# Altium PCB PCB_Challenge_1.PcbDoc
Units mil, origin at the board's own origin, x right, y up, seen from the top; angles counter-clockwise.
Board outline 3000 x 1995 mil, 2 copper layers (Top Layer, Bottom Layer); 50 components, 26 nets, 156 pads, 22 vias.
Unrouted connection lines stored in the file: 4.
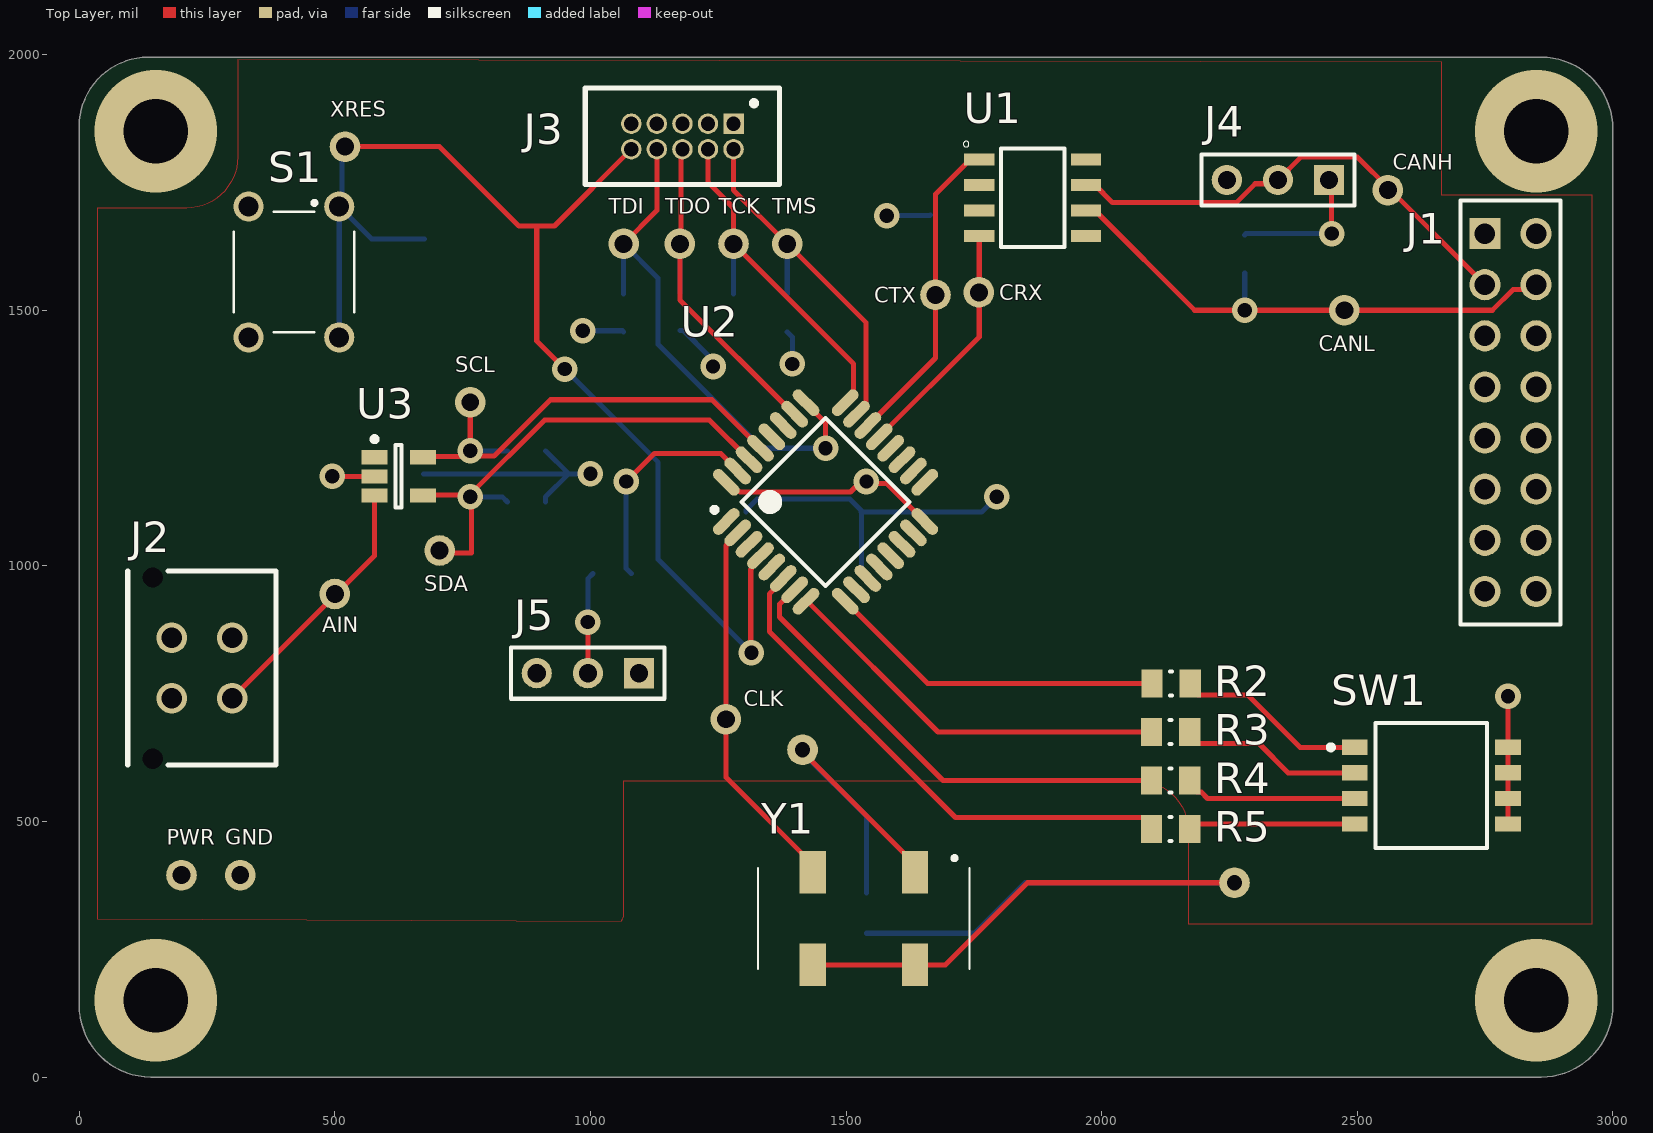
[diagram p0: Top Layer view]
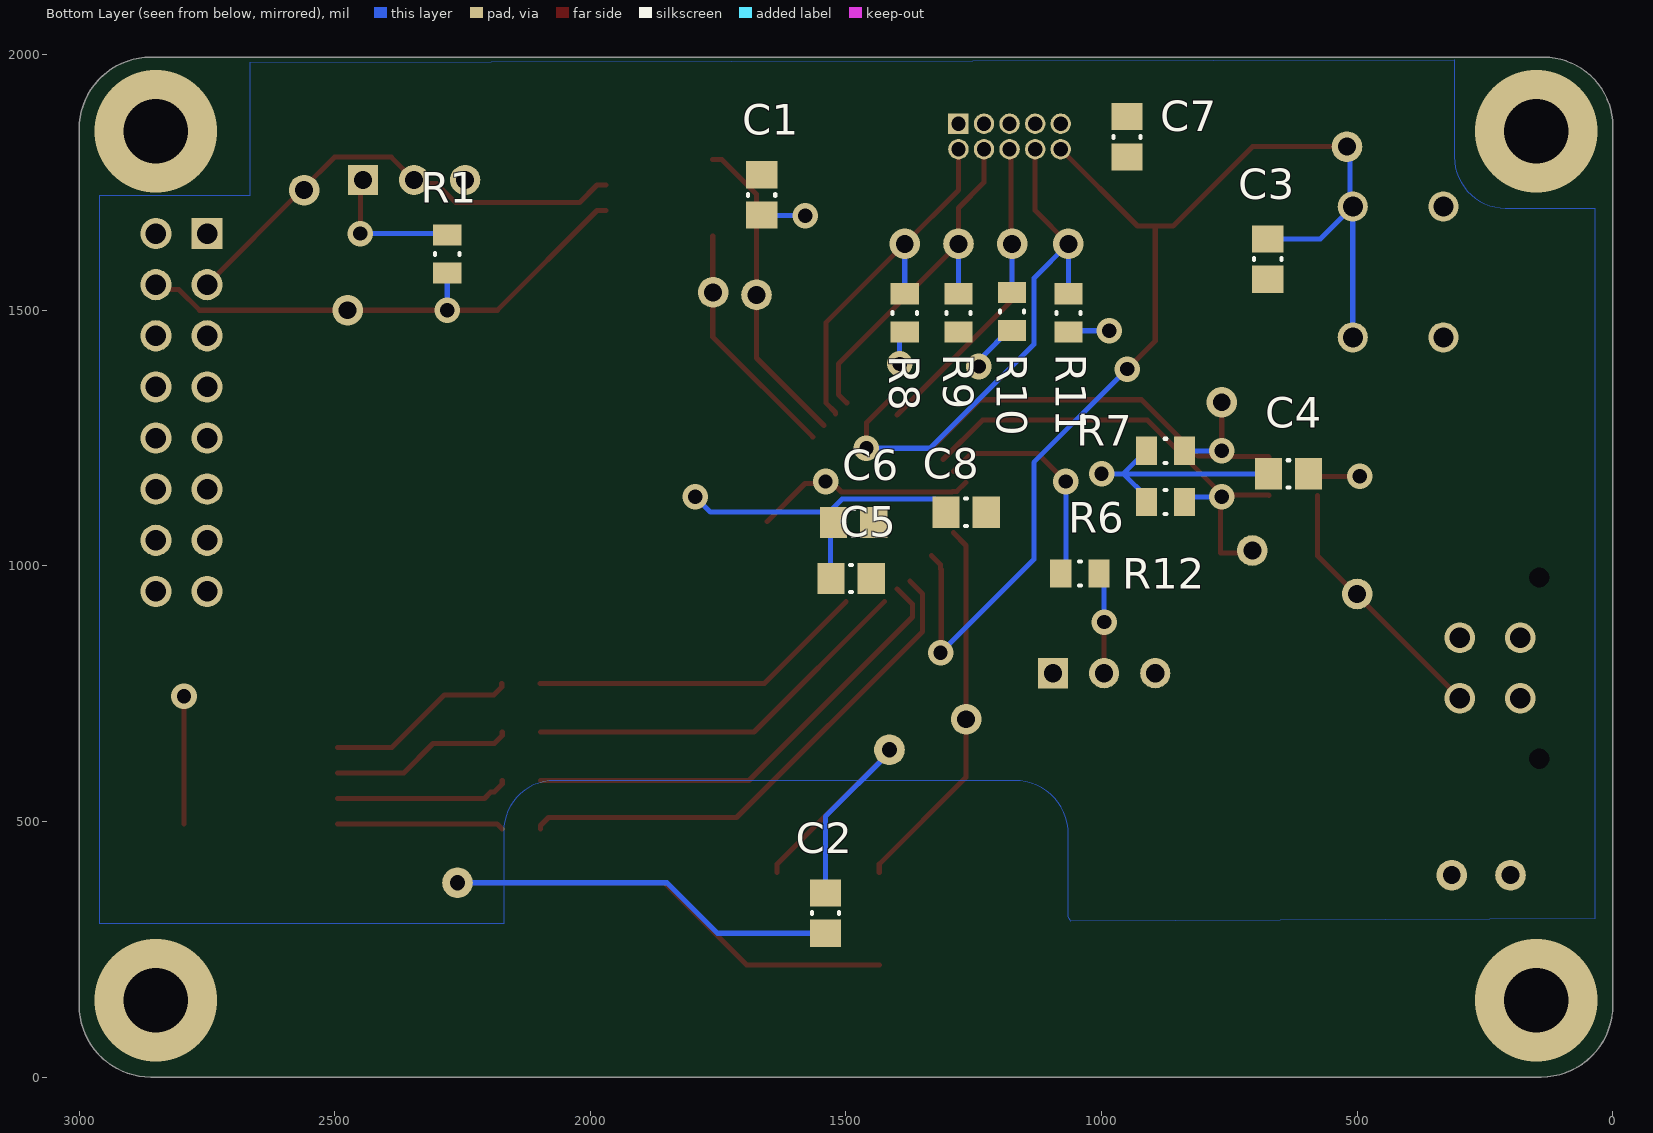
[diagram p1: Bottom Layer view, seen from below]

## Layer stack, top to bottom
Top Solder: solder mask 0.4, Solder Resist, Dk 3.5
Top Layer: signal copper 1.4
Dielectric 1: dielectric 12.6, FR-4, Dk 4.8
Bottom Layer: signal copper 1.4
Bottom Solder: solder mask 0.4, Solder Resist, Dk 3.5

## Board outline
135,1995 2860,1995 cw(c2860,1855) 3000,1855 3000,140 cw(c2860,140) 2860,0 140,0 cw(c140,140) 0,140 0,1860 cw(c135,1860)

## Design rules (kind name [scope] priority, off if disabled: settings)
Clearance [All] p1: gap=10 ignorepadtopadclearanceinfootprint=FALSE except(0: Arc-Hole Track-Hole SMDPad-Hole THPad-Hole Via-Hole Fill-Hole Poly-Hole Region-Hole Text-Hole)
PolygonConnect [All] p1: connectstyle=Relief reliefconductorwidth=10 reliefentries=4 polygonreliefangle="90 Angle" airgapwidth=10
RoutingVias [All] p1: holewidth=28 width=50 viastyle="Through Hole" minholewidth=28 minwidth=50 maxholewidth=28 maxwidth=50
SolderMaskExpansion [All] p1: expansion=4 istentingtop=FALSE
Width [All] p1: maxlimit=10 minlimit=10 preferedwidth=10
30 further rules are at their usual default settings.

## Classes and differential pairs
component class Challenge1: AIN C1 C2 C3 C4 C5 C6 C7 C8 C? CANH CANL CLK CRX CTX GND J1 J2 J3 J4 J5 PWR R1 R2 R3 R4 R5 R6 R7 R8 R9 R10 R11 R12 S1 SCL SDA SW1 TCK TDI TDO TMS U1 U2 U3 XRES Y1

## Components (designator, comment, footprint, x,y, rotation, side; value= is the part's Value field where it differs from the comment)
AIN "Test Point" "Test Point Through-hole" 525,925 r90 top
C1 "0.1uF" CAPC0805(2012)100_M 1665,1725.63 r90 bottom value=33pF
C2 "0.1uF" CAPC0805(2012)100_M 1540,320.63 r270 bottom value=33pF
C3 "0.1uF" CAPC0805(2012)100_M 675,1600 r270 bottom value=33pF
C4 "0.1uF" CAPC0805(2012)100_M 634.37,1180 r180 bottom value=33pF
C5 "0.1uF" CAPC0805(2012)100_M 1490,975 r180 bottom value=33pF
C6 "0.1uF" CAPC0805(2012)100_M 1485,1085 r180 bottom value=33pF
C7 "0.1uF" CAPC0805(2012)100_M 950,1839.37 r90 bottom value=33pF
C8 "0.1uF" CAPC0805(2012)100_M 1265,1105 r180 bottom value=33pF
CANH "Test Point" "Test Point Through-hole" 2585,1715 r90 top
CANL "Test Point" "Test Point Through-hole" 2500,1480 r90 top
CLK "Test Point" "Test Point Through-hole" 1290,680 r90 top
CRX "Test Point" "Test Point Through-hole" 1785,1515 r90 top
CTX "Test Point" "Test Point Through-hole" 1700,1510 r90 top
F1 "Screw Hole" "Screw Hole" 150,150 r0 top
F2 "Screw Hole" "Screw Hole" 2850,150 r0 top
F3 "Screw Hole" "Screw Hole" 2850,1850 r0 top
F4 "Screw Hole" "Screw Hole" 150,1850 r0 top
GND "Test Point" "Test Point Through-hole" 340,375 r90 top
J1 "SSQ-108-02-G-D" SMTC-SSQ-108-02-X-D 2850,1650 r270 top
J2 "Molex Micro" 0430450427 240,800 r270 top
J3 "SAMTEC-FTSH-105-01-X-D" SAMTEC-FTSH-105-01-X-D 1375.28,1956.77 r180 top
J4 "Header 3" HDR1X3 2445,1755 r180 top
J5 "Header 3" HDR1X3 1095,790 r180 top
PWR "Test Point" "Test Point Through-hole" 225,375 r90 top
R1 "120R" RESC0805(2012)_N 2280,1610 r90 bottom value="120.00 Ohm"
R2 "120R" RESC0805(2012)_N 2136,770 r180 top value="120.00 Ohm"
R3 "120R" RESC0805(2012)_N 2135,675 r180 top value="120.00 Ohm"
R4 "120R" RESC0805(2012)_N 2135,580 r180 top value="120.00 Ohm"
R5 "120R" RESC0805(2012)_N 2135,485 r180 top value="120.00 Ohm"
R6 "2k" RESC0805(2012)_N 875,1125 r0 bottom value="120.00 Ohm"
R7 "2k" RESC0805(2012)_N 875,1225 r0 bottom value="120.00 Ohm"
R8 "10k" RESC0805(2012)_N 1385,1495 r270 bottom value="120.00 Ohm"
R9 "10k" RESC0805(2012)_N 1280,1495 r270 bottom value="120.00 Ohm"
R10 "10k" RESC0805(2012)_N 1175,1497.6 r270 bottom value="120.00 Ohm"
R11 "10k" RESC0805(2012)_N 1065,1495 r270 bottom value="120.00 Ohm"
R12 "10k" RESC0805(2012)_N 1042.4,985 r0 bottom value="120.00 Ohm"
S1 "1825910-7" "Switch 6mm 24V (NO)" 420,1575 r270 top
SCL "Test Point" "Test Point Through-hole" 790,1300 r90 top
SDA "Test Point" "Test Point Through-hole" 730,1010 r90 top
SW1 "TDA04H0SB1" CKCP-TDA04H0SB1R_V 2645,570 r0 top
TCK "Test Point" "Test Point Through-hole" 1305,1610 r90 top
TDI "Test Point" "Test Point Through-hole" 1045,1605 r0 top
TDO "Test Point" "Test Point Through-hole" 1200,1610 r90 top
TMS "Test Point" "Test Point Through-hole" 1410,1610 r90 top
U1 "MCP2562-E/SN" SOIC127P600X175-8N 1865,1720 r0 top
U2 "STM32F334K6T6" STM-LQFP32_N 1460,1125 r45 top
U3 "MCP3021A0T-E/OT" SOT-23-OT5_M 625,1175 r0 top
XRES "Test Point" "Test Point Through-hole" 545,1800 r90 top
Y1 "SG-636PCW_50.0000MC3__ROHS" SG-636 1535,310 r180 top

## Footprints (in the part's own frame and the unit in brackets; to place one, negate y for a bottom-side part, rotate by r counter-clockwise, add the part's x,y. Pads: shape width x height; smd on the part's side, far side on the other; paste and mask are expansions set on the pad)
0430450427 [mil] "Molex micro-fit 3.0 4 pos"
  round 60 hole 40: 1(-59.06,59.06) 2(-59.06,-59.06) 3(59.06,59.06) 4(59.06,-59.06)
  round 0 hole 40 unplated: 7(177.17,-96.06) ""(-177.17,-96.06)
  silkscreen extent -190,-145 190,145
CAPC0805(2012)100_M [mm] "Chip Capacitor, Body 2.0x1.2mm, Height 1.0mm, IPC Low Density"
  rect 1.35x1.55 smd: 1(-1,0) 2(1,0)
  silkscreen extent -0.05,-0.67 0.05,0.67, body extent -1.1,-0.72 1.1,0.72, height 1
CKCP-TDA04H0SB1R_V [mm] "SMD, 8-Leads, Body 6.21x6.2mm, Pitch 1.27mm"
  rect 1.27x0.76 smd: 1(-3.81,1.905) 2(-3.81,0.635) 3(-3.81,-0.635) 4(-3.81,-1.905) 5(3.81,-1.905) 6(3.81,-0.635) 7(3.81,0.635) 8(3.81,1.905)
  silkscreen extent -5.12,-3.11 2.78,3.11, body extent -4.06,-3.1 4.06,3.11, height 2.3
HDR1X3 [mm] "Connector; Header; 3 Position"
  rect 1.5x1.5 hole 0.9: 1(0,0)
  round 1.5 hole 0.9: 2(2.54,0) 3(5.08,0)
  silkscreen extent -1.27,-1.27 6.35,1.27
RESC0805(2012)_N [mm] "Chip Resistor, Body 2.0x1.3mm, IPC Medium Density"
  rect 1.05x1.4 smd: 1(-0.95,0) 2(0.95,0)
  silkscreen extent -0.05,-0.6 0.05,0.6, body extent -1.1,-0.67 1.1,0.68, height 0.7
SAMTEC-FTSH-105-01-X-D [mil]
  rect 40x40 hole 28 mask+3: 1(95.28,91.77)
  round 40 hole 28 mask+3: 2(95.28,141.77) 3(145.28,91.77) 4(145.28,141.77) 5(195.28,91.77) 6(195.28,141.77) 7(245.28,91.77) 8(245.28,141.77) 9(295.28,91.77) 10(295.28,141.77)
  silkscreen extent 5,22 385,211
"Screw Hole" [mil]
SG-636 [mm]
  rect 1.3x2.1 smd: 1(-2.54,-2.3) 2(2.54,-2.3) 3(2.54,2.3) 4(-2.54,2.3)
  silkscreen extent -5.25,-3.1 5.25,2.5
SMTC-SSQ-108-02-X-D [mm] "SQ Post Socket, 2x8 Pins, Vertical, 2.54mm Pitch, Female"
  rect 1.55x1.55 hole 1.02: 1(0,-2.54)
  round 1.55 hole 1.02: 2(0,0) 3(2.54,-2.54) 4(2.54,0) 5(5.08,-2.54) 6(5.08,0) 7(7.62,-2.54) 8(7.62,0) 9(10.16,-2.54) 10(10.16,0) 11(12.7,-2.54) 12(12.7,0) 13(15.24,-2.54) 14(15.24,0) 15(17.78,-2.54) 16(17.78,0)
  silkscreen extent -1.65,-3.74 19.43,1.2, body extent -1.52,-3.75 19.3,1.21, height 8.51
SOIC127P600X175-8N [mm]
  rect 1.5x0.6 smd: 1(-2.65,1.905) 2(-2.65,0.635) 3(-2.65,-0.635) 4(-2.65,-1.905) 5(2.65,-1.905) 6(2.65,-0.635) 7(2.65,0.635) 8(2.65,1.905)
  silkscreen extent -3.44,-2.45 1.58,2.81
SOT-23-OT5_M [mm] "SOT23, 5-Leads, Body 2.9x1.7mm, Pitch 0.95mm, Lead Span 2.8mm, IPC Low Density"
  rect 1.3x0.7 smd: 1(-1.2,0.95) 2(-1.2,0) 3(-1.2,-0.95) 4(1.2,-0.95) 5(1.2,0.95)
  silkscreen extent -1.32,-1.55 0.15,1.97, body extent -0.9,-1.55 0.9,1.55, height 1.45
STM-LQFP32_N [mm] "QFP, 32-Leads, Body 7x7mm, Pitch 0.8mm, IPC Medium Density"
  oval 1.65x0.55 smd: 1(-4.175,2.8) 2(-4.175,2) 3(-4.175,1.2) 4(-4.175,0.4) 5(-4.175,-0.4) 6(-4.175,-1.2) 7(-4.175,-2) 8(-4.175,-2.8) 17(4.175,-2.8) 18(4.175,-2) 19(4.175,-1.2) 20(4.175,-0.4) 21(4.175,0.4) 22(4.175,1.2) 23(4.175,2) 24(4.175,2.8)
  oval 0.55x1.65 smd: 9(-2.8,-4.175) 10(-2,-4.175) 11(-1.2,-4.175) 12(-0.4,-4.175) 13(0.4,-4.175) 14(1.2,-4.175) 15(2,-4.175) 16(2.8,-4.175) 25(2.8,4.175) 26(2,4.175) 27(1.2,4.175) 28(0.4,4.175) 29(-0.4,4.175) 30(-1.2,4.175) 31(-2,4.175) 32(-2.8,4.175)
  silkscreen extent -4.3,-2.95 2.95,3.75, body extent -3.5,-3.5 3.5,3.5, height 1.6
"Switch 6mm 24V (NO)" [mm]
  round 1.498 hole 0.99: 1(-3.25,2.25) 2(3.25,2.25) 3(-3.25,-2.25) 4(3.25,-2.25)
  silkscreen extent -3.53,-3 3,3
"Test Point Through-hole" [mil]
  round 60 hole 35: 1(20,25)

## Part data
C1 C2 C3 C4 C5 C6 C7 C8: library part CMP-1036-01451-1, "CAP 33pF 200V ±1% 0805 (2012 Metric) Thickness 1mm SMD", Case-EIA=0805, Case-Metric=2012, Rated Voltage="200 V", Tolerance=Â±1%, Max Thickness="1 mm", Technology=SMT
F1 F2 F3 F4: "Add 4 of these to your design for screw hole mounting"
J1: library part CMP-1023-00300-1, "SQ Post Socket, Through-hole, Vertical, -55 to 125 degC, 2.54 mm Pitch, 16-Pin, Female, RoHS", Manufacturer=Samtec, Temperature Range="-55 to 125 degC", ComponentLink1Description="Manufacturer URL", ComponentLink1URL=http://www.samtec.com, ComponentLink2Description=Datasheet, ComponentLink2URL=http://www.samtec.com/documents/webfiles/pdf/SSQ_TH.PDF, ComponentLink3Description="Package Specification", ComponentLink3URL=http://www.samtec.com/documents/webfiles/cpdf/SSQ-1XX-XX-XXX-X-XX-XXX-XX-X-MKT.pdf, DatasheetVersion=F-214, Mounting Technology=Through-hole, Orientation=Vertical, PackageDescription="Assembly, Socket Strip .025[0.64] SQ Tail", PackageReference=SSQ-108-02-X-D, PackageVersion="BD, 6/1987", PartNumber=SSQ-108-02-G-D, Pitch="2.54 mm", RoHS=True
J2: library part "Molex micro-fit 4-pin (dual row schematic)", "Molex micro-fit 3.0, P/N 0430450427"
J4 J5: "Header, 3-Pin", LatestRevisionDate=17-Jul-2002, LatestRevisionNote="Re-released for DXP Platform.", Publisher="Altium Limited"
R1 R2 R3 R4 R5 R6 R7 R8 R9 R10 R11 R12: library part "120R 5% 0805", "120R 0.125W 5% 0805 (2012 Metric)  SMD", Case-EIA=0805, Case-Metric=2012, Power="0.125 W", Tolerance="5 %", Technology=SMT
S1: library part "Switch 6mm 24V (NO)", "FSM4JAH=6MM TACT SWITCH, HIGH TEMP", Contact_Current_Rating="50 mA", Package=None, Configuration_Pole-Throw="Single Pole - Single Throw", Digi-Key_Part_Number=450-1804-ND, Digi-Key_Purchase_URL=https://www.digikey.com/product-detail/en/te-connectivity-alcoswitch-switches/1825910-7/450-1804-ND/1731414?utm_source=snapeda&utm_medium=aggregator&utm_campaign=symbol, EU_RoHS_Compliance=Compliant, MF="TE Connectivity", MP=1825910-7, SnapEDA_Link=https://www.snapeda.com/parts/1825910-7/TE%20Connectivity%20ALCOSWITCH%20Switches/view-part/?ref=snap, TE_purchase_URL=https://www.te.com/usa-en/product-1825910-7.html?te_bu=Cor&te_type=disp&te_campaign=seda_glo_cor-seda-global-disp-prtnr-fy19-seda-model-bom-cta_sma-317_1&elqCampaignId=32493
SW1: library part "Dip Switch Array SMD Half-Pitch", "Ultra-Miniature Surface Mount Half-Pitch DIP Switch, 25 mA, 24 V, -40 to 85 degC, 8-Pin SMD, RoHS, Tube", Case\Package=DIP, Contact Current Rating="100 mA", Max Contact Resistance="100 mohm", Max Current Rating="25 mA", Max Operating Temperature="85 degC", Max Voltage Rating (DC)="24 V", Min Operating Temperature="-40 degC", Package Quantity=70, ComponentLink1Description=Datasheet, ComponentLink1URL=http://www.ck-components.com/media/1328/tda.pdf, Contact Finish=Gold, Contact Material=Copper, Contact Plating=Gold, Current Rating="100 mA", DatasheetVersion=02/2016, Height="2.3 mm", Lead Pitch="1.27 mm", Length="6.21 mm", Mount="Surface Mount", Mounting Technology="Surface Mount", PackageDescription="8-Pin Surface Mount Device, Body 6.21 x 6.2 mm, Pitch 1.27 mm", PackageReference=TDA04H0SB1R, Packaging=Rail/Tube, Pins=4, Radiation Hardening=No, REACH SVHC="No SVHC", RoHSCompliant=true, Throw Configuration=SPST, Voltage Rating (DC)="24 V"
U1: library part "CAN Tranceiver", "Microchip MCP2562-E/SN, CAN Transceiver 1MBps 1-channel IEC 61000-4-2, 8-Pin SOIC", Package="SO-8 Microchip", Availability=Unavailable, MF=Microchip, MP=MCP2562-E/SN, Price=None, SnapEDA_Link=https://www.snapeda.com/parts/MCP2562-E/SN/Microchip/view-part/?ref=snap
U2: "ARM Cortex-M4 32-bit MCU, 32-Pin LQFP, 32 KB Flash, 16 KB Internal RAM, 25 I/Os, -40 to 85 degC, Tray", I/Os (High Current)=25, Operating Frequency(F) (Processor speed) (MHz)=72, Package Description="32-Pin Low Profile Quad Flat Package, 7 x 7 mm Body, 0.8 mm Pitch", Package Reference=LQFP32, Supply Voltage(Vcc) min (V)=2, ComponentLink1Description="Manufacturer URL", ComponentLink1URL=http://www.st.com/, ComponentLink2Description=Datasheet, ComponentLink2URL=http://www.st.com/st-web-ui/static/active/en/resource/technical/document/datasheet/DM00097745.pdf, Core="ARM Cortex-M4", D/A Converter=3, DatasheetVersion="Rev. 4", FLASH Size (Prog) (kB)=32, Internal RAM Size (kB)=16, Mounting Technology="Surface Mount", Packing=Tray
U3: library part CMP-0188-01214-1, "Low Power 10-Bit A/D Converter With I2C Interface, 5-Pin SOT-23, Extended Temperature, Tape and Reel", Code_IPC=SOT23-5, ComponentLink1Description="Manufacturer URL", ComponentLink1URL=http://www.microchip.com/, ComponentLink2Description=Datasheet, ComponentLink2URL=http://ww1.microchip.com/downloads/en/DeviceDoc/21805a.pdf, ComponentLink3Description="Package Specification", ComponentLink3URL=http://www.microchip.com/stellent/groups/techpub_sg/documents/packagingspec/en012702.pdf, DatasheetVersion="revA, May-2003", PackageDescription="5-Lead Plastic Small Outline Transistor (OT) [SOT-23]", PackageReference=SOT-23-OT5, PackageVersion="revBB, Aug-2009"
Y1: library part Oscilator, "Standard Clock Oscillators", Arrow Part Number="SG-636PCW 50.0000MC3: ROHS", Manufacturer_Name="Epson Timing", Datasheet Link=http://www.mouser.com/ds/2/137/G-636PCE_en-1003252.pdf, Manufacturer_Part_Number="SG-636PCW 50.0000MC3: ROHS"

## Free pads (board coordinates)
  round 60 hole 30: 2(1415,640) 3(2260,380)

## Via types
v1: diameter 50, hole 28, Top Layer to Bottom Layer, 18 vias
v2: diameter 240, hole 126, Top Layer to Bottom Layer, 4 vias

## Nets (pads, with @x,y where several pads share a name; then routed paths per layer and width w, separated by ;. In a path a pad name is that pad's centre, name@x,y a point inside that pad or via, vN(x,y) a via of type N, cw(c..) or ccw(c..) an arc to the next point about the centre after c; other vN are vias at no path point)
3v3: C1.1 C2.1 C4.1 C5.1 C6.1 C7.1 C8.1 J1.2 J2.2 J3.1 J5.1 pad.2 PWR.1 R6.2 R7.2 R8.2 R10.2 R11.2 U1.3 U2.1 U2.5 U2.17 U3.1 Y1.1 | length 2106.3
  Top Layer w10: pad.2 1415,636.3 1635,416.3 Y1.1
  Bottom Layer w10: C4.1 957.4,1180 ; R6.2 912.4,1135 957.4,1180 ; R7.2 957.4,1180 ; 960.51,1180 v1(1000,1180) ; v1(985,1460) 1062.6,1460 R11.2 ; R10.2 1181.89,1460.2 1232.35,1409.74 1232.35,1397.65 v1(1240,1390) ; C8.1 1304.37,1108.94 1325.94,1130.51 1507.8,1130.51 1529.37,1108.94 C6.1@1529.37,1105 ; R8.2 1395,1447.6 v1(1395,1395) ; pad.2 1415,635 1540,510 C2.1 ; C5.1@1530,985 1530,1104.37 C6.1@1529.37,1105 ; v1(1580,1685) 1663.74,1685 C1.1 ; v1(1795,1135) 1765,1105 C6.1@1529.37,1105
AIN: AIN.1 J2.3 U3.3 | length 512.1
  Top Layer w10: J2.3 577.76,1019.65 U3.3
CANH: CANH.1 J1.3 J4.2 U1.7 | length 935.2
  Top Layer w10: U1.7 1987.05,1745 2021.57,1710.47 2263.44,1710.47 2300.47,1747.5 2337.5,1747.5 J4.2 2389.53,1799.53 2500.47,1799.53 2562.5,1737.5 J1.3
CANL: CANL.1 J1.4 R1.1 U1.6 | length 1054.8
  Top Layer w10: U1.6 1987.05,1695 2182.05,1500 v1(2280,1500) 2764.36,1500 2804.6,1540.24 2840.24,1540.24 J1.4
  Bottom Layer w10: v1(2280,1500) R1.1
CanRX: CRX.1 U1.4 U2.21 | length 473.6
  Top Layer w10: U2.21 1760.67,1447.94 1760.67,1535 U1.4
CanTX: CTX.1 U1.1 U2.22 | length 621
  Top Layer w10: U2.22 1675,1406.81 CTX.1 1675,1727.05 1742.95,1795 U1.1
CLK: CLK.1 U2.2 Y1.2 | length 745.2
  Top Layer w10: U2.2@1290,1065 1265,1040 CLK.1 1265,586.3 1435,416.3 Y1.2
GND: C1.2 C2.2 C3.2 C4.2 C5.2 C6.2 C7.2 C8.2 GND.1 J1.6 J1.8 J1.10 J1.12 J1.14 J1.16 J2.1 J3.3 J3.5 J3.9 J5.3 pad.3 R9.2 S1.3 S1.4 SW1.5 SW1.6 SW1.7 SW1.8 U1.2 U2.16 U2.32 U3.2 Y1.3 Y1.4 | length 2406.6
  Top Layer w10: v1(495,1175) U3.2 585,1175 U3.2@590,1180 ; U2.32 1283.37,1145.74 1291.38,1145.74 1292.71,1144.41 1508.59,1144.41 1529.18,1165 v1(1540,1165) 1544.1,1160.9 1580,1160.9 U2.16 ; Y1.3 Y1.4 1694.45,219.45 1855,380 pad.3@2245,380 ; SW1.5 SW1.6 SW1.7 SW1.8 v1(2795,745)
  Bottom Layer w10: C2.2 1751.26,281.26 1850,380 pad.3@2245,380
NetJ4_1: J4.1 R1.2 | length 278.1
  Top Layer w10: J4.1 2450,1750 v1(2450,1650)
  Bottom Layer w10: R1.2 2282.6,1650 v1(2450,1650)
NetJ5_2: J5.2 R12.1 | length 199.1
  Top Layer w10: J5.2 v1(995,890)
  Bottom Layer w10: v1(995,890) 995,975 R12.1
NetR2_1: R2.1 SW1.1 | length 377.4
  Top Layer w10: R2.1 2173.4,763.11 2189.07,747.44 2285.8,747.44 2388.24,645 SW1.1
NetR2_2: R2.2 U2.9 | length 664.9
  Top Layer w10: U2.9@1500,930 1660,770 R2.2
NetR3_1: R3.1 SW1.2 | length 359.8
  Top Layer w10: R3.1 2172.4,668.11 2188.07,652.44 2307.8,652.44 2365.24,595 SW1.2
NetR3_2: R3.2 U2.8 | length 778.2
  Top Layer w10: U2.8@1425,930 1680,675 R3.2
NetR4_1: R4.1 SW1.3 | length 341.1
  Top Layer w10: R4.1 2172.4,573.11 2188.07,557.44 2194.96,557.44 2207.4,545 SW1.3
NetR4_2: R4.2 U2.7 | length 927.6
  Top Layer w10: U2.7@1400,955 1370,925 1370,900 1690,580 R4.2
NetR5_1: R5.1 SW1.4 | length 326.7
  Top Layer w10: R5.1 2182.4,495 SW1.4
NetR5_2: R5.2 U2.6 | length 1020.5
  Top Layer w10: U2.6@1375,970 1350,945 1350,871.72 1714.16,507.56 2081.93,507.56 2097.6,491.89 R5.2
NetR12_2: R12.2 U2.31 | length 441.3
  Top Layer w10: v1(1070,1165) 1125,1220 1255,1220 U2.31@1290,1185
  Bottom Layer w10: v1(1070,1165) 1070,994.8 R12.2
SCL: R7.1 SCL.1 U2.29 U3.5 | length 923.9
  Top Layer w10: U3.5 673.54,1213.7 763.7,1213.7 v1@765,1215 ; SCL.1 v1@765,1215 ; U2.29 1237.73,1325 921.72,1325 811.72,1215 v1@765,1215
  Bottom Layer w10: v1(765,1225) R7.1
SDA: R6.1 SDA.1 U2.30 U3.4 | length 988.5
  Top Layer w10: U3.4 673.44,1138.8 763.8,1138.8 v1@765,1140 ; SDA.1 710,1025 767.5,1025 767.5,1137.5 v1@765,1140 ; U2.30 1233.19,1285 910,1285 v1@765,1140
  Bottom Layer w10: v1(765,1135) 827.6,1135 R6.1
TCK: J3.4 R9.1 TCK.1 U2.24 | length 718.9
  Top Layer w10: J3.4 1230,1750.21 1280,1700.21 TCK.1 1515,1395 1515,1335 1499.18,1319.18 U2.24
  Bottom Layer w10: R9.1 TCK.1
TDI: J3.8 R11.1 TDI.1 U2.25 | length 1056
  Top Layer w10: TDI.1 1130,1695 J3.8 ; U2.25@1417.5,1322.5 1460,1280 v1(1460,1230)
  Bottom Layer w10: R11.1 TDI.1 1132.44,1562.56 1132.44,1433.31 1335.76,1230 v1(1460,1230)
TDO: J3.6 R10.1 TDO.1 U2.26 | length 710.3
  Top Layer w10: J3.6 1177.5,1812.5 1177.5,1632.5 TDO.1 1175,1520 U2.26@1400,1295
  Bottom Layer w10: R10.1 TDO.1
TMS: J3.2 R8.1 TMS.1 U2.23 | length 731
  Top Layer w10: J3.2 1280,1735 TMS.1 1539.42,1475.58 1539.42,1318.93 1520.55,1300.06 U2.23
  Bottom Layer w10: R8.1 TMS.1
XRES: C3.1 J3.10 S1.1 S1.2 U2.4 XRES.1 | length 2464
  Top Layer w10: XRES.1 705,1820 860,1665 895,1665 ; v1(950,1385) 895,1440 895,1665 ; J3.10 930,1665 895,1665 ; v1(1315,830) 1313.77,831.23 1313.77,993.02 1315.1,994.35 1315.1,1002.37 U2.4
  Bottom Layer w10: S1.2 S1.1 ; XRES.1 514.29,1814.29 514.29,1708.66 S1.1 ; C3.1 572.17,1639.37 S1.1 ; v1(950,1385) 1132.5,1202.5 1132.5,1012.5 v1(1315,830)
pads on no net: J1.1 J1.5 J1.7 J1.9 J1.11 J1.13 J1.15 J2. J2.4 J2.7 J3.7 J4.3 U1.5 U1.8 U2.3 U2.10 U2.11 U2.12 U2.13 U2.14 U2.15 U2.18 U2.19 U2.20 U2.27 U2.28
copper on no net:
  other v2: 150,150 2850,150 150,1850 2850,1850

## Polygon pours and split planes (outlines as drawn)
3v3 on Top Layer "3v3" (solid, shelved, pour order 2): 310,1990 310,1800 cw(c210,1800) 210,1700 35,1700 35,310 1060,305 ccw(c1047.93,317.07) 1065,317.07 1065,580 2070,580 cw(c2070,480) 2170,480 2170,300 2960,300 2960,1725 2665,1725 2665,1985
GND on Bottom Layer "Ground" (solid, shelved, pour order 0): 310,1990 310,1800 cw(c210,1800) 210,1700 35,1700 35,310 1060,305 ccw(c1047.93,317.07) 1065,317.07 1065,475 cw(c1170,475) 1170,580 2070,580 cw(c2070,480) 2170,480 2170,300 2960,300 2960,1725 2665,1725 2665,1985